# EAGLE board tracksoar chip shield (EAGLE 7.3.0)
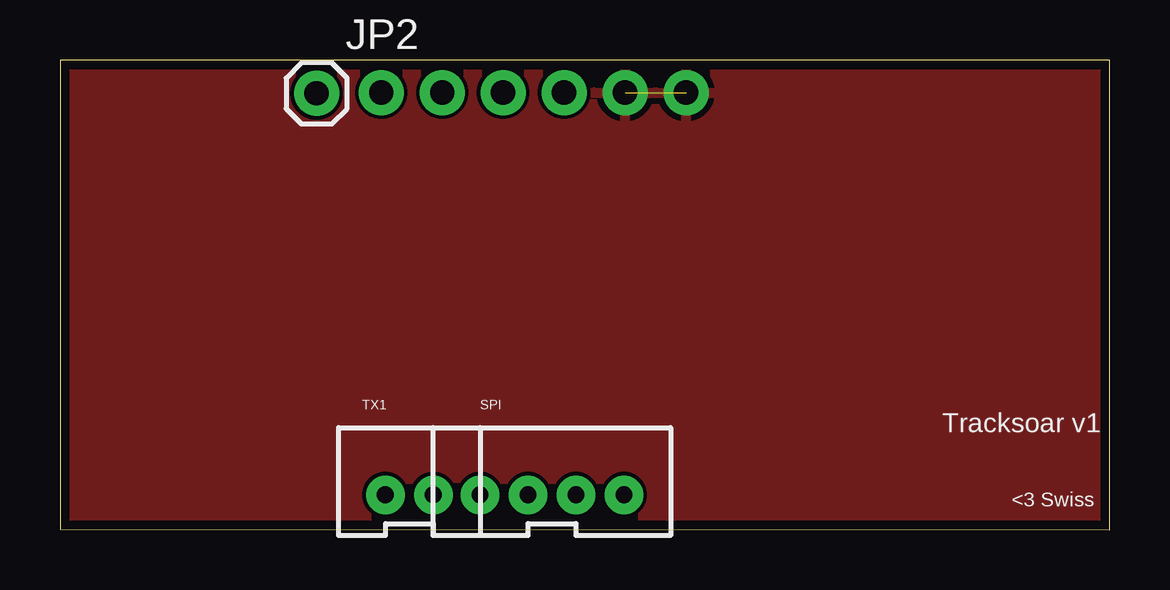
[diagram p0: board, top side]
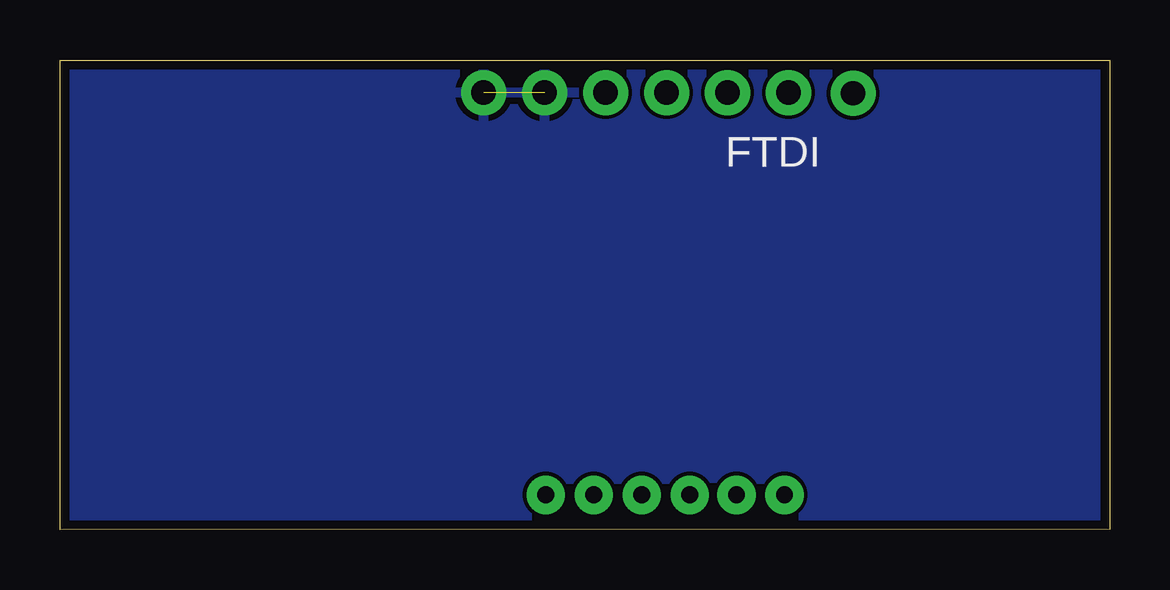
[diagram p1: board, bottom side, seen from below]

Size 43.74 x 19.57 mm. Coordinates in mm from the lower left corner, seen from the top.
Outline: 0,0.03 43.74,0 43.74,3.81 43.74,19.57 0,19.57 0,0.03
Copper layers (1*16): Top 0.0356mm / dielectric 1.5011mm / Bottom 0.0356mm
Design rules "oshpark-2layer": minimum track width 6mil, minimum drill 13mil, track to track 6mil, track to pad 6mil, pad to pad 6mil, via to via 6mil, smd to smd 6mil, copper to edge 15mil, drill to drill 6mil, minimum pad ring 7mil, minimum via ring 7mil, stop-mask expansion 4mil, vias tented up to drill 0mil, thermal gap 10mil

## Footprints (pad centres in the part's own frame; a part is rotated, then mirrored left to right if it is on the bottom)
1X06_NO_SILK = drill 1.016 pad 1.88: 1 0,0; 2 2.54,0; 3 5.08,0; 4 7.62,0; 5 10.16,0; 6 12.7,0
1X01 = drill 1.016 pad 1.88: 1 0,0
JST-4-PTH-VERT = drill 0.7 pad 1.6: 1 -3,-0.55; 2 -1,-0.55; 3 1,-0.55; 4 3,-0.55
JST-2-PTH-VERT = drill 0.7 pad 1.6: 1 -1,-0.55; 2 1,-0.55

## Placement (x,y rotation side)
FRAME1  FRAME-LETTER  [CREATIVE_COMMONS]  14.78,-7.8 0 top  (outside the outline)
FTDI  [1X06_NO_SILK]  13.39,18.21 180 bottom
JP2  [1X01]  10.69,18.19 0 top
SPI  [JST-4-PTH-VERT]  20.5,2.01 0 top
TX1  TX  [JST-2-PTH-VERT]  14.55,2.01 0 top

## Library data of the parts
FRAME1 = SparkFun-Aesthetics
FTDI = SparkFun-Connectors; PROD_ID: CONN-08437
JP2 SPI TX1 = SparkFun-Connectors

## Nets
!RESET: JP2.1
DTR: FTDI.1
GND: FTDI.5 FTDI.6
MISO: SPI.2
MOSI: SPI.3
RXO: FTDI.2
SCK: SPI.1
SCL: TX1.1
SDA: TX1.2
SS: SPI.4
TXO: FTDI.3
VCC: FTDI.4

## Tracks (layer width: path | path; a pad name or v marks a point on that pad's centre or on a via)
GND  (1 unrouted)
  pour Top: 0,19.58 43.74,19.58 43.74,0 0,0.03 0.05,3.78
  pour Bottom: 0,19.58 43.74,19.58 43.74,0 0,0.03 0.05,3.78

## Text on the board
tNames: Tracksoar v1 | <3 Swiss